# Altium PCB noname_2023-07-10.pcbdoc
Units mil, origin at the board's own origin, x right, y up, seen from the top; angles counter-clockwise.
Board outline 2945 x 2265 mil, 2 copper layers (Top Layer, Bottom Layer); 2 components, 9 nets, 68 pads, 0 vias.
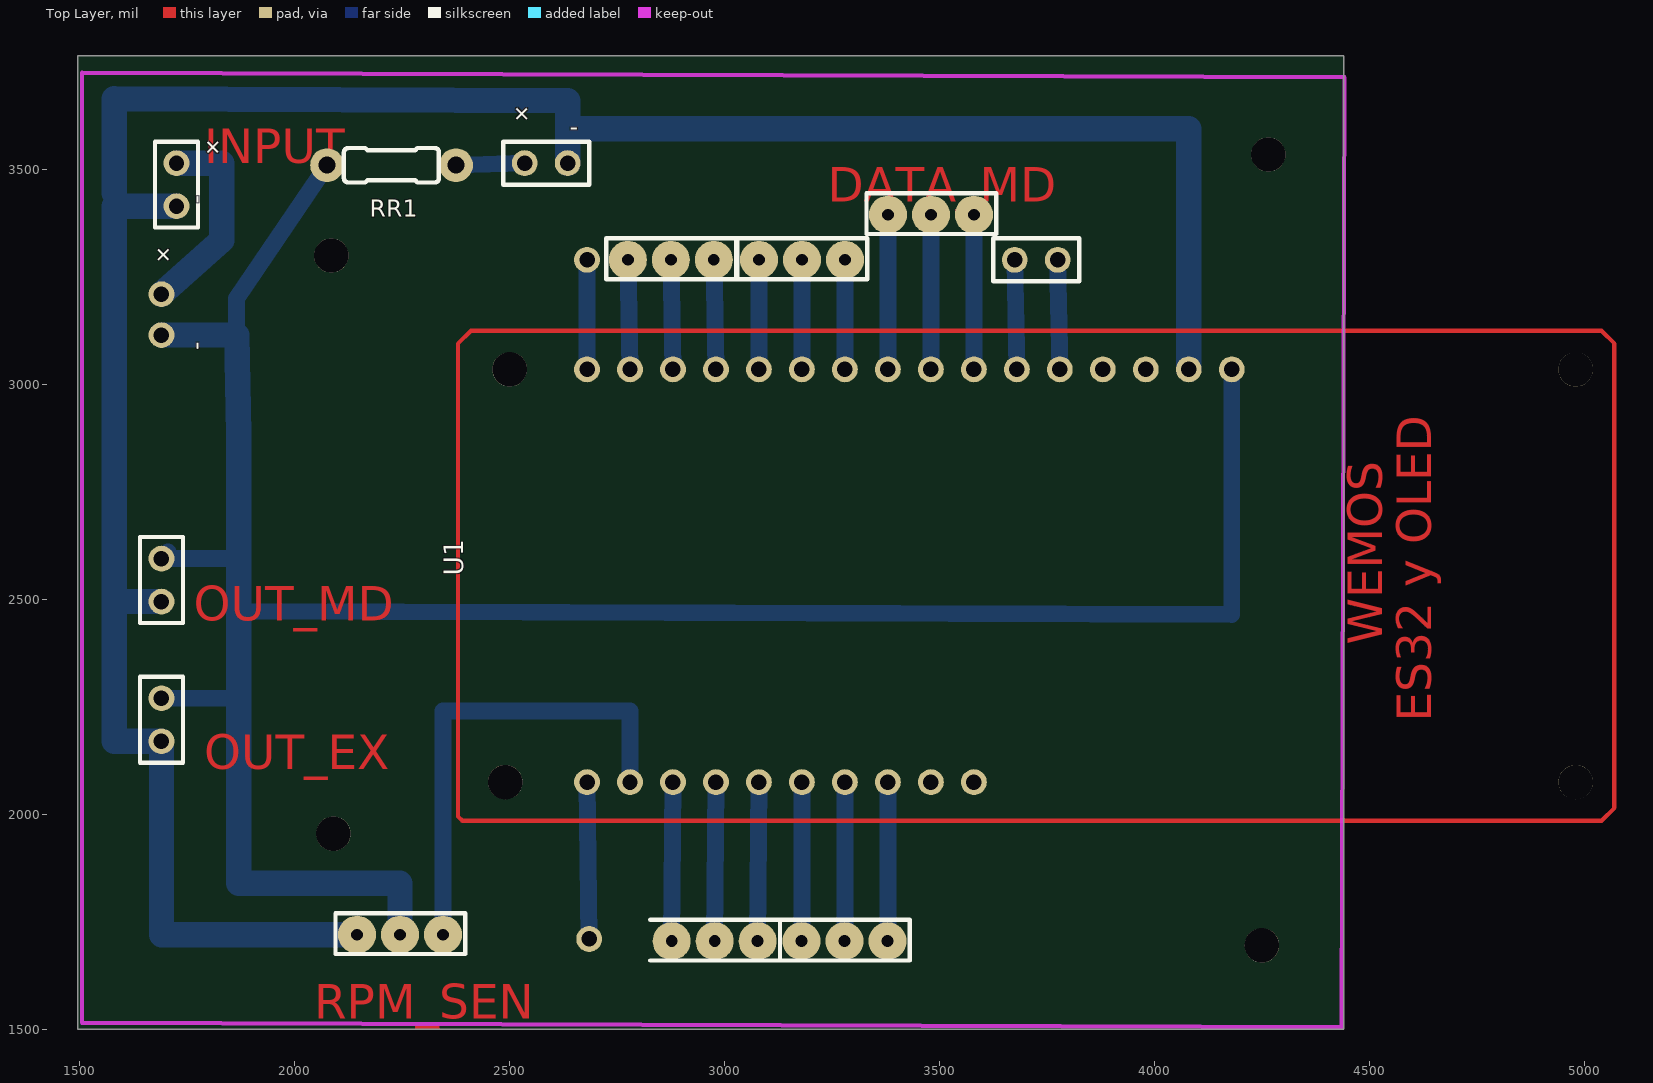
[diagram p0: Top Layer view]
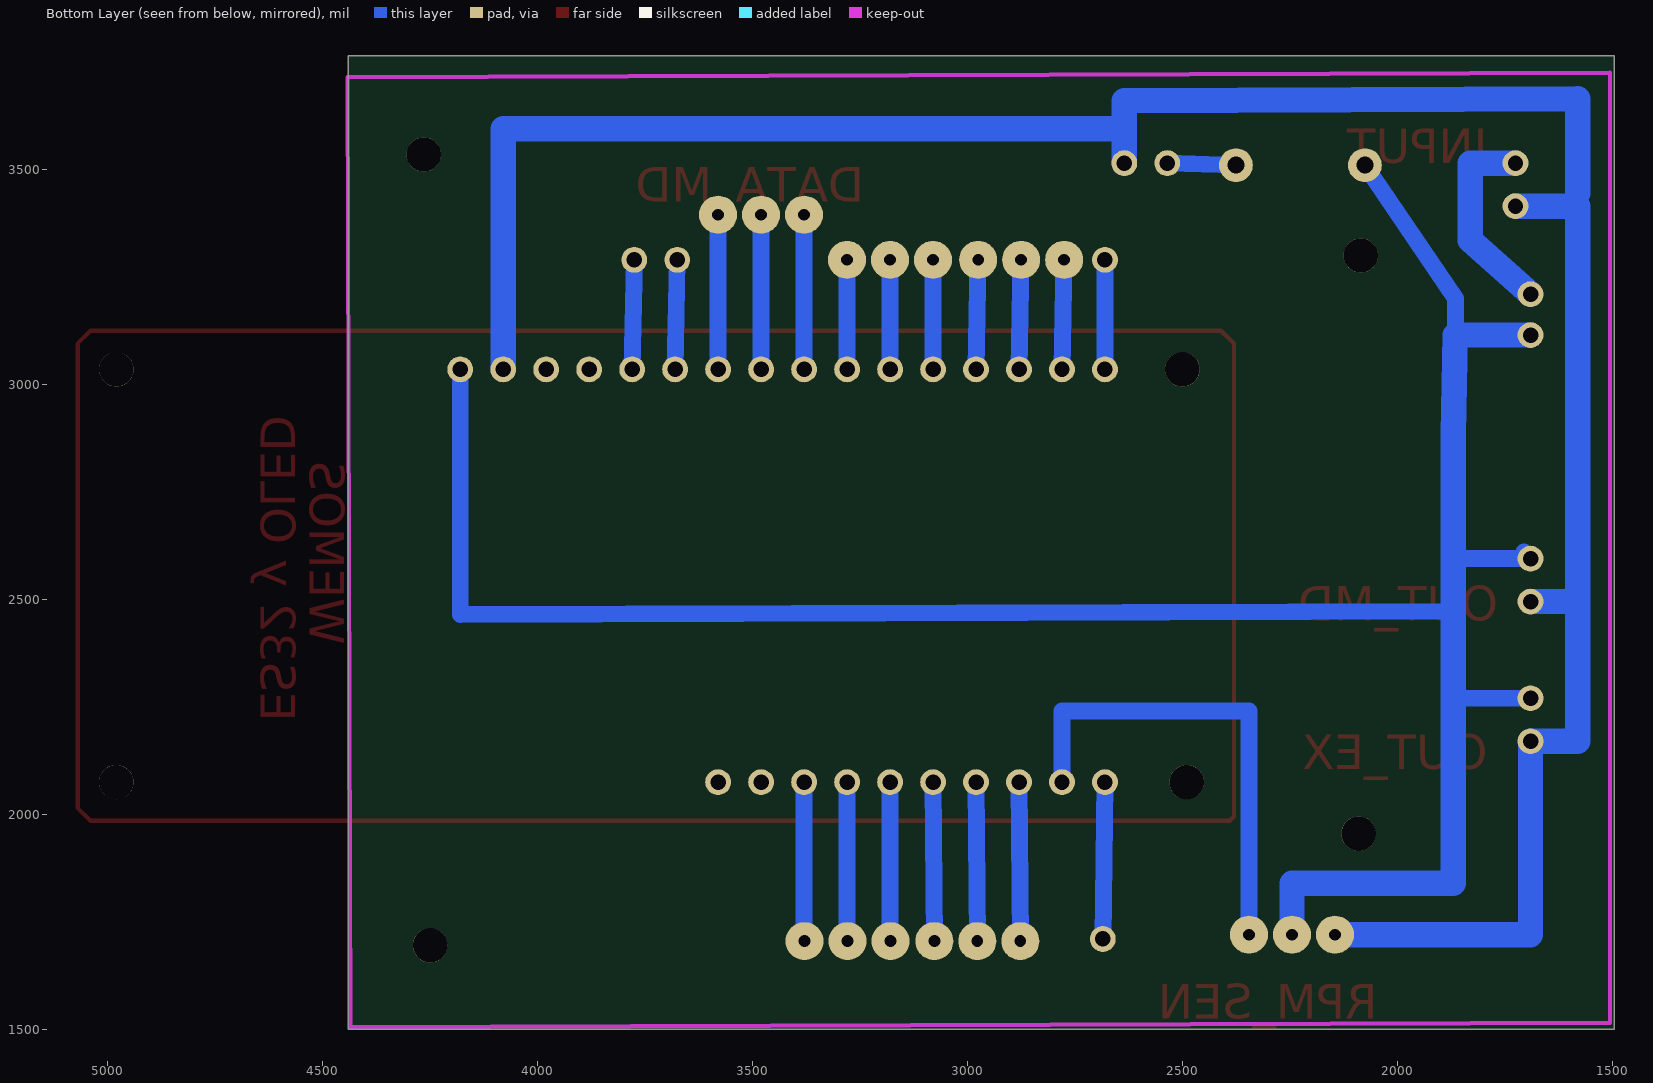
[diagram p1: Bottom Layer view, seen from below]

## Layer stack, top to bottom
Top Solder: solder mask 0.4, Solder Resist, Dk 3.5
Top Layer: signal copper 1.4
Dielectric1: dielectric 12.6, FR-4, Dk 4.8
Bottom Layer: signal copper 1.4
Bottom Solder: solder mask 0.4, Solder Resist, Dk 3.5

## Board outline
4440,1500 1495,1500 1495,3765 4440,3765

## Design rules (kind name [scope] priority, off if disabled: settings)
Clearance [All] p1: gap=10 ignorepadtopadclearanceinfootprint=FALSE except(0: Arc-Hole Track-Hole SMDPad-Hole THPad-Hole Via-Hole Fill-Hole Poly-Hole Region-Hole Text-Hole)
PolygonConnect [All] p1: connectstyle=Relief reliefconductorwidth=10 reliefentries=4 polygonreliefangle="90 Angle" airgapwidth=10
RoutingVias [All] p1: holewidth=28 width=50 viastyle="Through Hole" minholewidth=28 minwidth=50 maxholewidth=28 maxwidth=50
SolderMaskExpansion [All] p1: expansion=4 istentingtop=FALSE
Width [All] p1: maxlimit=10 minlimit=10 preferedwidth=10
30 further rules are at their usual default settings.

## Components (designator, comment, footprint, x,y, rotation, side; value= is the part's Value field where it differs from the comment)
RR1 "100K" ? 2225,3510 r0 top
U1 "WEMOS ES32 OLED" "WEMOS ES32 OLED" 3680,2575 r90 top

## Footprints (in the part's own frame and the unit in brackets; to place one, negate y for a bottom-side part, rotate by r counter-clockwise, add the part's x,y. Pads: shape width x height; smd on the part's side, far side on the other; paste and mask are expansions set on the pad)
"WEMOS ES32 OLED" [mil]
  round 60 hole 36: 1(-500,1000) 2(-500,900) 3(-500,800) 4(-500,700) 5(-500,600) 6(-500,500) 7(-500,400) 8(-500,300) 9(-500,200) 10(-500,100) 11(460,1000) 12(460,900) 13(460,800) 14(460,700) 15(460,600) 16(460,500) 17(460,400) 18(460,300) 19(460,200) 20(460,100) 21(460,0) 22(460,-100) 23(460,-200) 24(460,-300) 25(460,-400) 26(460,-500)
  round 80 hole 80 unplated: ""(-500,1190) ""(-500,-1300) ""(460,1180) ""(460,-1300)
  Top Layer lines w10: -580,1300 520,1300 550,1270 550,-1360 520,-1390 460,-1390 -560,-1390 -590,-1360 -590,1290 ; -580,1300 -590,1290 ; -580,1300 -590,1290 ; -580,1300 -590,1290
? [mil]
  round 78.7 hole 39.4: 1(-149.7,0.1) 2(150.3,0.1)
  silkscreen extent -111,-40 111,40

## Free pads (board coordinates)
  round 60 hole 36: 1(1690,2270) 1(1690,2595) 1(1725,3515) 1(2535,3515) 1(3675,3290) 2(1690,2170) 2(1690,2495) 2(1725,3415) 2(2635,3515) 2(3775,3290) 4(2680,3290) 5(2685,1710) 6(1690,3115) 7(1690,3210)
  round 88.58 hole 27.56: 1(2145,1720) 1(2775,3290) 1(2877,1705) 1(3080,3290) 1(3179,1705) 1(3380,3395) 2(2245,1720) 2(2875,3290) 2(2977,1705) 2(3180,3290) 2(3279,1705) 2(3480,3395) 3(2345,1720) 3(2975,3290) 3(3077,1705) 3(3280,3290) 3(3379,1705) 3(3580,3395)
  round 80 hole 80 unplated: ""(2085,3300) ""(2090,1955) ""(4250,1695) ""(4265,3535)

## Nets (pads, with @x,y where several pads share a name; then routed paths per layer and width w, separated by ;. In a path a pad name is that pad's centre, name@x,y a point inside that pad or via, vN(x,y) a via of type N, cw(c..) or ccw(c..) an arc to the next point about the centre after c; other vN are vias at no path point)
+9V: pad.1@2535,3515 pad.1@3675,3290 pad.3@2345,1720 pad.3@2975,3290 pad.3@3077,1705 pad.3@3379,1705 RR1.2 U1.2 U1.5 U1.8 U1.14 U1.21 | length 2558.6
  Bottom Layer w39.37: pad.3@2350,1725 2345,1720 2345,2240 2780,2240 U1.2 ; RR1.2 pad.1@2535,3515 ; U1.14 2975,3290 pad.3@2980,3295 ; U1.5 3077,1705 pad.3@3082,1710 ; U1.8 3380,1706 3379,1705 pad.3@3384,1710 ; pad.1@3675,3290 U1.21
S$7: 
S$33: 
S$17180: pad.3@3280,3290 pad.3@3580,3395 U1.17 U1.20 | length 615
  Bottom Layer w39.37: U1.17 pad.3@3280,3290 ; U1.20 pad.3@3580,3395
S$17182: pad.2@3180,3290 pad.2@3480,3395 U1.16 U1.19 | length 615
  Bottom Layer w39.37: U1.16 pad.2@3180,3290 ; U1.19 pad.2@3480,3395
S$17184: pad.1@3080,3290 pad.1@3380,3395 U1.15 U1.18 | length 615
  Bottom Layer w39.37: U1.15 pad.1@3080,3290 ; U1.18 pad.1@3380,3395
S$17304: pad.1@1690,2270 pad.1@1690,2595 pad.1@1725,3515 pad.1@2145,1720 pad.1@2775,3290 pad.1@2877,1705 pad.1@3179,1705 pad.2@1690,2170 pad.2@1690,2495 pad.2@1725,3415 pad.2@2245,1720 pad.2@2635,3515 pad.2@2875,3290 pad.2@2977,1705 pad.2@3279,1705 pad.2@3775,3290 pad.6 pad.7 RR1.1 U1.3 U1.4 U1.6 U1.7 U1.9 U1.10 U1.12 U1.13 U1.22 U1.25 | length 14999.7
  Bottom Layer w39.37: pad.1@1690,2270 1870,2270 ; pad.1@1705,2610 1690,2595 1870,2595 ; 1865,3115 1865,3200 RR1.1 ; 1870,2472.47 4180,2465 4180,3035 ; pad.1@2775,3290 U1.12 ; pad.2@2875,3290 U1.13 ; pad.1@2877,1705 U1.3 ; pad.2@2977,1705 U1.4 ; pad.1@3179,1705 3180,1706 U1.6 ; pad.2@3279,1705 3280,1706 U1.7 ; pad.2@3775,3290 U1.22
  Bottom Layer w59.05: 1580,3105 1580,2785 1580,2170 1690,2170 1690,1720 pad.1@2145,1720 ; 1580,3445 1580,3665 2635,3660 ; pad.2@1690,2495 1580,2495 1580,3415 pad.2@1725,3415 ; pad.6 1865,3115 1870,2885 1870,1840 2245,1840 pad.2@2245,1720 ; pad.7 1830,3335 1830,3515 pad.1@1725,3515 ; pad.2@2635,3515 2635,3660 ; U1.25 4080,3595 2635,3595 2635,3660
S$27161: pad.4 U1.11 | length 255
  Bottom Layer w39.37: U1.11 pad.4
S$27222: pad.5 U1.1 | length 365
  Bottom Layer w39.37: U1.1 pad.5
pads on no net: U1. U1.23 U1.24 U1.26

## Other copper
Top Layer:
  text "INPUT" at 1790,3515 h80
  text "DATA_MD" at 3240,3425 h80
  text "OUT_MD" at 1765,2450 h80
  text "OUT_EX" at 1790,2105 h80
  text "RPM_SEN" at 2045,1525 h80

## Silkscreen, mask and mechanical layers (free items; w line width, h text height)
Top Overlay:
  lines w10: 1740,2270 1740,2320 ; 1740,2595 1740,2645 ; 1775,3515 1775,3565 ; 2535,3565 2485,3565 ; 2827,1660 3129,1660 ; 2827,1755 3129,1755 ; 3675,3340 3625,3340 ; 1740,2320 1740,2120 1640,2120 1640,2320 1740,2320 ; 1740,2645 1740,2445 1640,2445 1640,2645 1740,2645 ; 1775,3565 1775,3365 1675,3365 1675,3565 1775,3565 ; 2397,1675 2397,1770 ; 2397,1675 2095,1675 2095,1770 2397,1770 ; 2397,1675 2397,1770 ; 2485,3565 2685,3565 2685,3465 2485,3465 2485,3565 ; 3129,1660 3129,1755 ; 3129,1660 3129,1755 ; 3129,1660 3431.01,1660 3431.01,1755 3129,1755 ; 3625,3340 3825,3340 3825,3240 3625,3240 3625,3340 ; 2725,3245 2725,3340 3027,3340 3027,3245 2725,3245 ; 3030,3245 3030,3340 3332,3340 3332,3245 3030,3245 ; 3330,3350 3330,3445 3632,3445 3632,3350 3330,3350
  text "-" at 2660,3610 h40 r180
  text "+" at 2524.14,3600.86 h40 r45
  text "+" at 1780.86,3555.86 h40 r315
  text "-" at 1790,3420 h40 r90
  text "+" at 1665.86,3305.86 h40 r315
  text "-" at 1790,3080 h40 r90

## Text inside footprints (layer, text, board x,y; h text height)
U1: Top Layer "WEMOS" at 4530,2395 h80 r90; Top Layer "ES32 y OLED" at 4643.6,2215 h80 r90